# Altium PCB current_sensor_pcb.PcbDoc
Units mil, origin at the board's own origin, x right, y up, seen from the top; angles counter-clockwise.
Board outline 1538 x 1343 mil, 2 copper layers (Top Layer, Bottom Layer); 24 components, 17 nets, 126 pads, 25 vias.
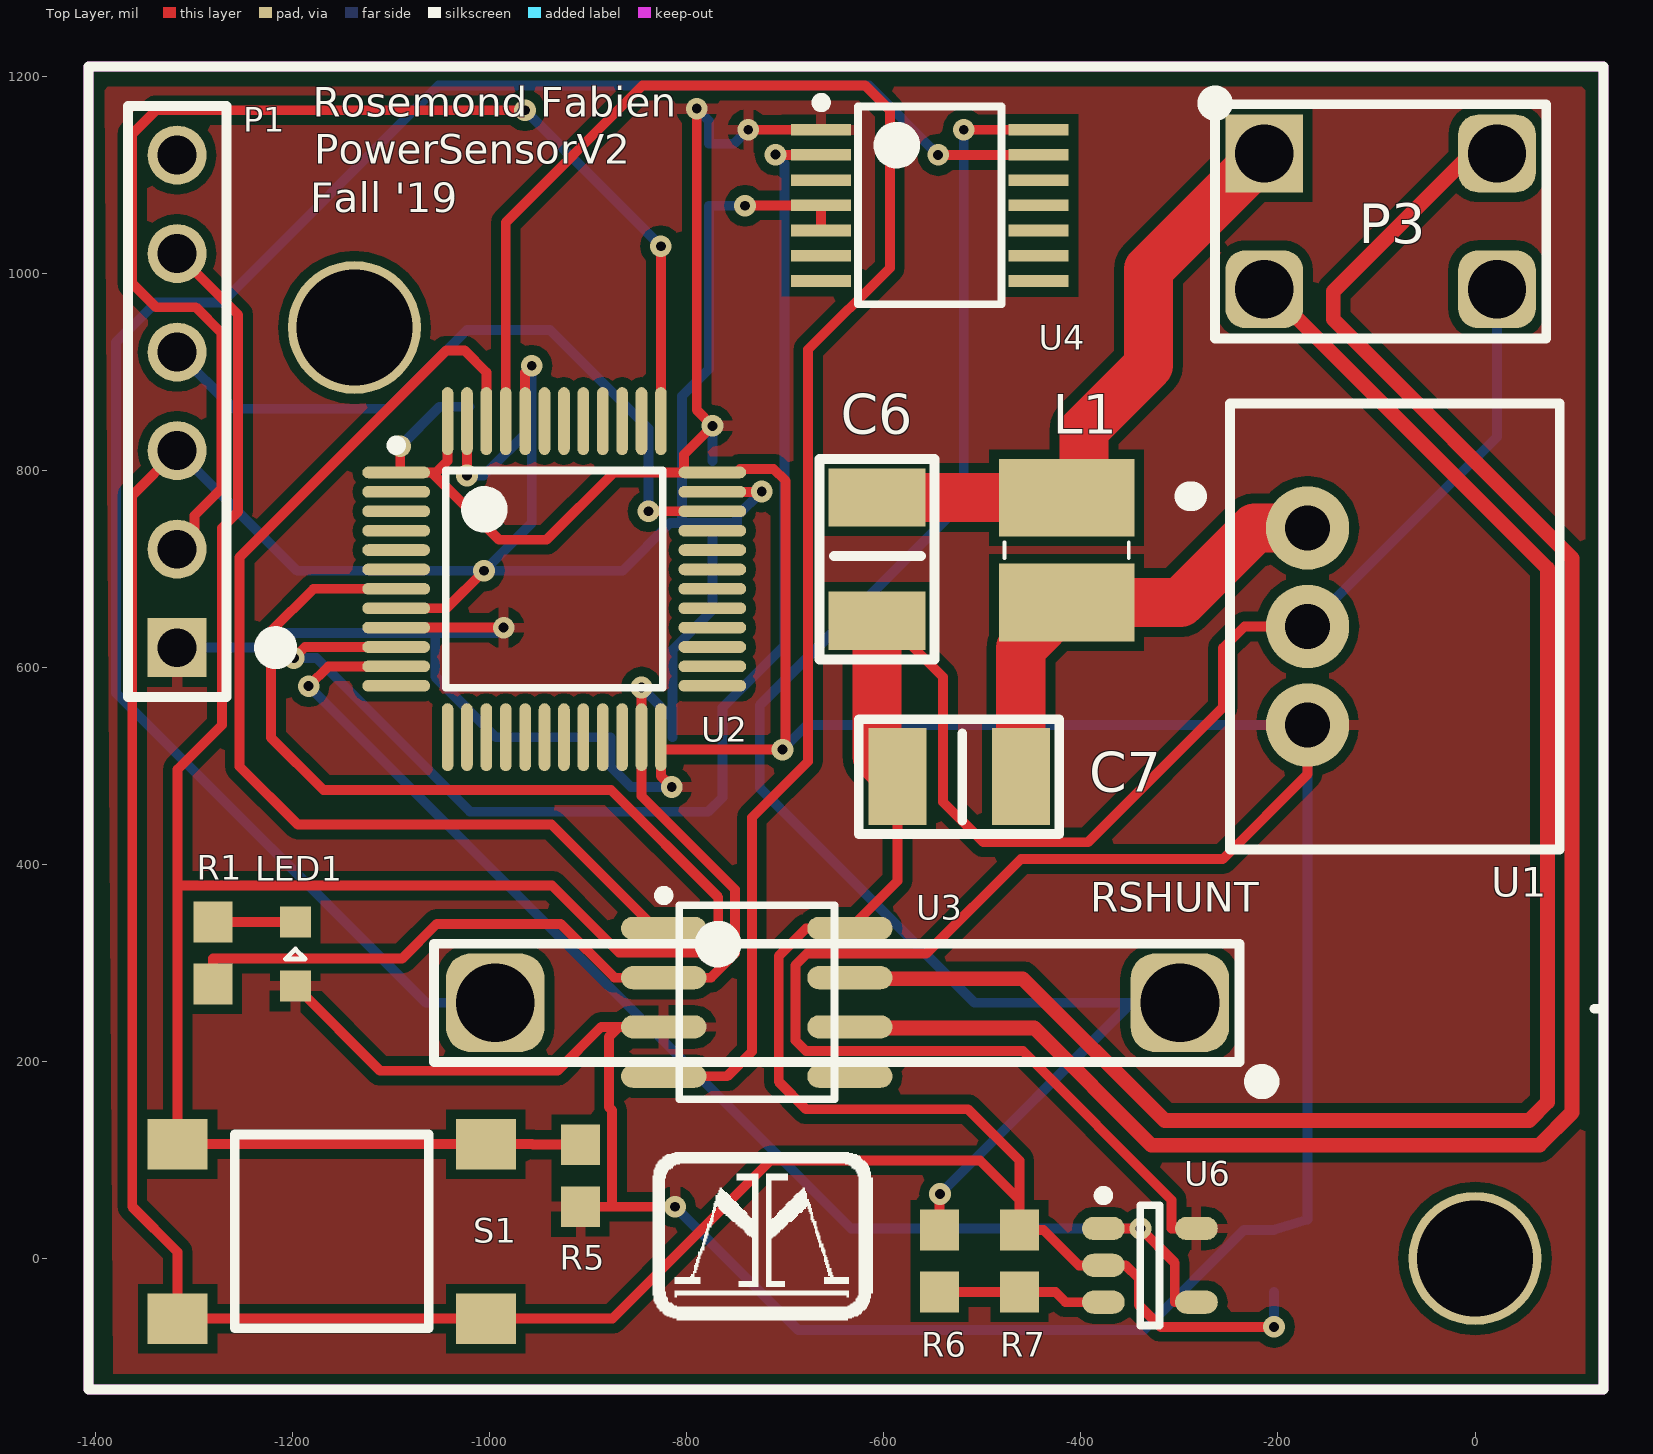
[diagram p0: Top Layer view]
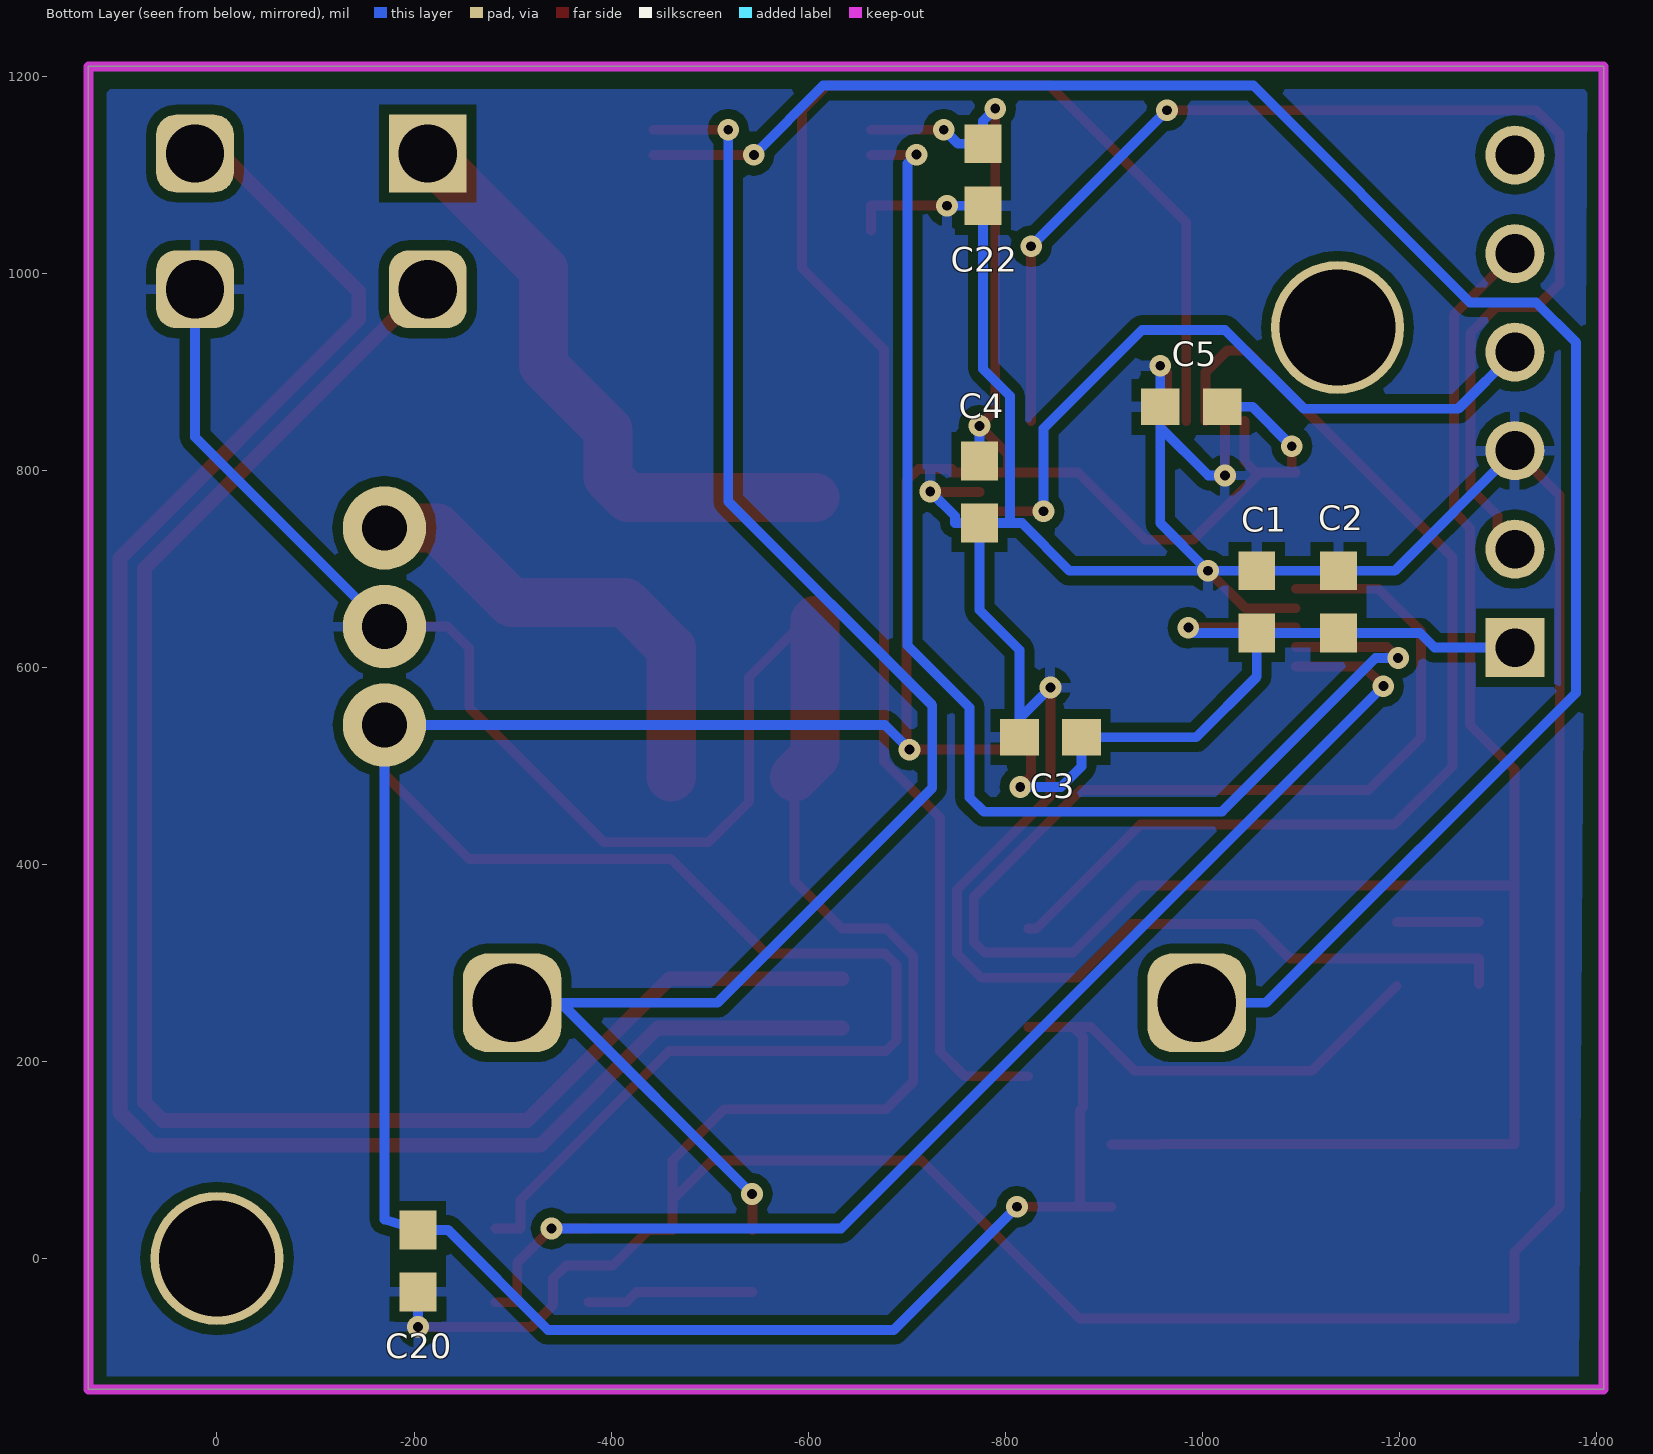
[diagram p1: Bottom Layer view, seen from below]

## Layer stack, top to bottom
Top Solder: solder mask 0.4, Solder Resist, Dk 3.5
Top Layer: signal copper 1.4
Dielectric 1: dielectric 12.6, FR-4, Dk 4.8
Bottom Layer: signal copper 1.4
Bottom Solder: solder mask 0.4, Solder Resist, Dk 3.5

## Board outline
-1407.5,-133 130.5,-133 130.5,1210 -1407.5,1210

## Design rules (kind name [scope] priority, off if disabled: settings)
Clearance [All] p1: gap=10 ignorepadtopadclearanceinfootprint=TRUE except(0: Arc-Hole Track-Hole SMDPad-Hole THPad-Hole Via-Hole Fill-Hole Poly-Hole Region-Hole Text-Hole; 7: Track-Track Track-SMDPad Track-Via SMDPad-SMDPad)
DiffPairsRouting [All] p1: maxlimit=10 minlimit=10 mostfreqgap=10 toplayer_minwidth=15 toplayer_maxwidth=15 toplayer_prefwidth=15 bottomlayer_minwidth=15 bottomlayer_maxwidth=15 bottomlayer_prefwidth=15 maxuncoupledlength=500
HoleSize [All] p1: absolutevalues=TRUE maxlimit=150 minlimit=10 maxpercent=80.000 minpercent=20.000
MinimumAnnularRing [All] p1: minimumring=7
MinimumSolderMaskSliver [All] p1: minsoldermaskwidth=1
PolygonConnect [All] p1: connectstyle=Relief reliefconductorwidth=10 reliefentries=4 polygonreliefangle="90 Angle" airgapwidth=10
RoutingVias [All] p1: holewidth=10 width=22 viastyle="Through Hole" minholewidth=10 minwidth=22 maxholewidth=100 maxwidth=150
SilkToSolderMaskClearance [IsPad] p1: minsilkscreentomaskgap=5 clearancetoexposedcopper=TRUE
SolderMaskExpansion [All] p1: expansion=4
Width [All] p1: maxlimit=150 minlimit=8 preferedwidth=10
26 further rules are at their usual default settings.

## Classes and differential pairs
differential pair CAN: +CAN_P -CAN_N

## Components (designator, comment, footprint, x,y, rotation, side; value= is the part's Value field where it differs from the comment)
C1 "Cap" CAPC0603 -1055.47,666.5 r90 bottom value=1uF
C2 "Cap" CAPC0603 -1138.5,666.5 r90 bottom value=10nF
C3 "Cap" CAPC0603 -846.08,529.13 r0 bottom value=100nF
C4 "Cap" CAPC0603 -774,778 r270 bottom value=100nF
C5 "Cap" CAPC0603 -989,864.5 r0 bottom value=100nF
C6 "CAP1210" CAP1210 -607,773.29 r90 top value=10uF
C7 "CAP1210" CAP1210 -460.21,489 r0 top value=10uF
C20 "Cap" CAPC0603 -204,-2.57 r90 bottom value=1uF
C22 "Cap" CAPC0603 -777.5,1100 r90 bottom value=10nF
L1 "RLS-567" RLS567 -414.5,719 r270 top
LED1 "LED" LED0603 -1197.5,309 r90 top
P1 "SWD" SWD_STM32 -1317.5,620 r180 top
P3 "WSBM8518L1000JT-MOLEX_4" WSBM8518L1000JT-MOLEX_4 -95.81,1052.71 r0 top locked
R1 "Res" RES0603 -1281,309.98 r270 top value=1k
R5 "Res" RES0603 -908,84 r90 top value=1k
R6 "Res" RES0603 -543.5,-2.57 r270 top value=698k
R7 "Res" RES0603 -462.5,-2.57 r90 top value=100k
RSHUNT "Res" WSBM8518L5000JK -299.62,259.51 r0 top value=500u
S1 "Button" PTS645xxxxSMTR92 -1160.5,27.5 r180 top
U1 "R-78C3.3-1.0" R-78C3.3-1.0 -170,741.5 r270 top
U2 "STM32F072CB" STM32F072CB -934.66,689.57 r0 top
U3 "SN65HVD230DR" SOIC-8pin -729,260 r0 top
U4 "INA302A3" INA302A2IPW -553.5,1069 r0 top
U6 "MCP6L01" MCP6L01R -330,-7 r0 top

## Footprints (in the part's own frame and the unit in brackets; to place one, negate y for a bottom-side part, rotate by r counter-clockwise, add the part's x,y. Pads: shape width x height; smd on the part's side, far side on the other; paste and mask are expansions set on the pad)
CAP1210 [mm]
  rect 1.5x2.5 smd: 1(-0.02,0) 2(-3.2,0)
  silkscreen extent -4.2,-1.48 0.97,1.48, body extent -3.22,-1.25 0,1.26, height 2.5
CAPC0603 [mm] "Chip Capacitor, 2-Leads, Body 1.60x0.80mm, IPC Medium Density"
  rect 1x0.95 smd: 1(-0.8,0) 2(0.8,0)
  body extent -0.88,-0.48 0.87,0.48, height 0.8
INA302A2IPW [mm] "IC CURRENT SENSING AMP 14TSSOP"
  rect 1.55x0.3 smd: 1(-2.8,1.95) 2(-2.8,1.3) 3(-2.8,0.65) 4(-2.8,0) 5(-2.8,-0.65) 6(-2.8,-1.3) 7(-2.8,-1.95) 8(2.8,-1.95) 9(2.8,-1.3) 10(2.8,-0.65) 11(2.8,0) 12(2.8,0.65) 13(2.8,1.3) 14(2.8,1.95)
  silkscreen extent -2.92,-2.55 1.85,2.77, body extent -2.25,-2.55 2.25,2.55, height 1.2
LED0603 [mm] "Chip LED, 2-Leads, Body 1.60x0.80mm, IPC Medium Density"
  rect 0.8x0.8 smd: A(-0.825,0) C(0.825,0)
  silkscreen extent -0.13,-0.25 0.13,0.25, body extent -0.88,-0.48 0.87,0.47, height 0.8
MCP6L01R [mm] "SOT23, 5-Leads, Body 2.90x2.70mm, Pitch 0.95mm, IPC Medium Density"
  oval 1.1x0.6 smd: 1(-1.2,0.95) 2(-1.2,0) 3(-1.2,-0.95) 4(1.2,-0.95) 5(1.2,0.95)
  silkscreen extent -1.32,-1.55 0.25,1.92, body extent -0.9,-1.55 0.9,1.55, height 1.45
PTS645xxxxSMTR92 [mm] "PTS645 Series SMT 6 mm Tactile Switch"
  rect 1.555x1.3 smd: A(-3.975,2.25) A(3.975,2.25) B(-3.975,-2.25) B(3.975,-2.25)
  silkscreen extent -2.5,-2.5 2.5,2.5, body extent -3,-3 3,3, height 4.5
R-78C3.3-1.0 [mm] "CONV DC/DC 1A 3.3V OUT SIP VERT"
  round 2.15 hole 1.15: 1(0,0) 2(2.54,0) 3(5.08,0)
  Bottom Layer region: 0.457,-3.048
  silkscreen extent -3.21,-3.05 8.29,6.5, body extent -3.3,-2.03 8.38,6.6, height 10.4
RES0603 [mm] "Chip Resistor, 2-Leads, Body 1.60x0.80mm, IPC Medium Density"
  rect 1.05x1 smd: 1(-0.8,0) 2(0.8,0)
  body extent -0.88,-0.48 0.87,0.47, height 0.8
RLS567 [mm]
  rect 2x3.5 smd: 1(-1.35,0) 2(1.35,0)
  silkscreen extent -0.2,-1.6 0.2,1.6, body extent -2.54,-1.9 2.54,1.91, height 2.6
SOIC-8pin [mm] "For 296-1345-1-ND"
  oval 2.2x0.6 smd: 1(-2.4,1.905) 2(-2.4,0.635) 3(-2.4,-0.635) 4(-2.4,-1.905) 5(2.4,-1.905) 6(2.4,-0.635) 7(2.4,0.635) 8(2.4,1.905)
  silkscreen extent -2.52,-2.5 2,2.88, body extent -2,-2.5 2,2.5, height 1.75
STM32F072CB [mm] "TSQFP, 48-Leads, Body 7.00x7.00mm, Pitch 0.50mm, IPC Medium Density"
  oval 1.75x0.3 smd: 1(-4.075,2.75) 2(-4.075,2.25) 3(-4.075,1.75) 4(-4.075,1.25) 5(-4.075,0.75) 6(-4.075,0.25) 7(-4.075,-0.25) 8(-4.075,-0.75) 9(-4.075,-1.25) 10(-4.075,-1.75) 11(-4.075,-2.25) 12(-4.075,-2.75) 25(4.075,-2.75) 26(4.075,-2.25) 27(4.075,-1.75) 28(4.075,-1.25) 29(4.075,-0.75) 30(4.075,-0.25) 31(4.075,0.25) 32(4.075,0.75) 33(4.075,1.25) 34(4.075,1.75) 35(4.075,2.25) 36(4.075,2.75)
  oval 0.3x1.75 smd: 13(-2.75,-4.075) 14(-2.25,-4.075) 15(-1.75,-4.075) 16(-1.25,-4.075) 17(-0.75,-4.075) 18(-0.25,-4.075) 19(0.25,-4.075) 20(0.75,-4.075) 21(1.25,-4.075) 22(1.75,-4.075) 23(2.25,-4.075) 24(2.75,-4.075) 37(2.75,4.075) 38(2.25,4.075) 39(1.75,4.075) 40(1.25,4.075) 41(0.75,4.075) 42(0.25,4.075) 43(-0.25,4.075) 44(-0.75,4.075) 45(-1.25,4.075) 46(-1.75,4.075) 47(-2.25,4.075) 48(-2.75,4.075)
  silkscreen extent -4.2,-2.8 2.8,3.57, body extent -3.5,-3.5 3.5,3.5, height 1.6
SWD_STM32 [mil] "SWD connector matching the pinout on STM Discovery Boards"
  rect 60x60 hole 39.37: 1(0,0)
  round 60 hole 39.37: 2(0,-100) 3(0,-200) 4(0,-300) 5(0,-400) 6(0,-500)
  silkscreen extent -110,-550 50,50
WSBM8518L1000JT-MOLEX_4 [mm] "4 pins of molex type MX150 male to female connector"
  rect 2x2 hole 1.5: 1(-3,1.75)
  rrect50% 2x2 hole 1.5: 2(3,1.75) 3(-3,-1.75) 4(3,-1.75)
  silkscreen extent -4.42,-3.02 4.27,3.2
WSBM8518L5000JK [mil] "2 shunt resistor pins of MOLEX type WSBM8518L1000JT"
  rrect50% 100x100 hole 80: 1(0,0) 2(-694.88,0)
  silkscreen extent -757,-86 89,60

## Part data
C1 C20: Manufacturer Part Number=C0603C105K8PACTU, Supplier Part Number 1=399-3118-2-ND, Supplier 1=Digi-Key
C2 C22: Supplier Part Number 1=490-1313-2-ND, Supplier 1=Digi-Key
C3 C4 C5: Supplier Part Number 1=399-7374-2-ND, Supplier 1=Digi-Key
C6 C7: "CAP CER 10UF 50V 20% X5R 1210", Supplier Part Number 1=CGA6P1X7R1N106K250AC, Supplier 1=Digi-Key
L1: "Inductor", Manufacturer_Name="RECOM Power", Mouser Part Number=919-RLS-567, Datasheet Link=https://componentsearchengine.com/Datasheets/1/RLS-567.pdf, Height=3.1mm, Manufacturer_Part_Number=RLS-567, Mouser Price/Stock=https://www.mouser.com/Search/Refine.aspx?Keyword=919-RLS-567
LED1: Color=Green, Supplier Part Number 1=754-1122-1-ND, Supplier 1=Digi-Key
P1: library part SWD_STM32, "SWD connector matching the pinout on STM Discovery Boards"
P3: "4 pins of molex type MX150 male to female connector", Manufacturer 1=Vishay-Dale, Manufacturer Part Number 1=WSBM8518L1000JK, Mating Connector Part Number 1=WM15276-ND, Supplier Part Number 1=541-1906-ND, Supplier Number 1=Digi-Key
R1 R5: Supplier Part Number 1=RNF14FTD1K00TR-ND, Supplier 1=Digi-Key
R6: Supplier Part Number 1=634KXCT-ND, Supplier 1=Digi-Key
R7: Supplier Part Number 1=100KXTR-ND, Supplier 1=Digi-Key
RSHUNT: Supplier Part Number 1=RMCF0603JT10K0CT-ND, Supplier 1=Digi-Key
S1: "SPST Button", Supplier Part Number 1=CKN9087CT-ND, Supplier 1=Digi-Key
U1: "CONV DC/DC 1A 3.3V OUT SIP VERT", Supplier Part Number 1=945-1394-5-ND, Supplier 1=Digi-Key
U2: "MCU 32BIT 128KB FLASH 48LQFP", Supplier Part Number 1=497-14645-ND, Supplier 1=Digi-Key
U3: "IC TXRX CAN 1MBPS 3.3V 8SOIC", Supplier Part Numbe 1=296-11654-1-ND, Supplier 1=Digi-Key
U4: library part INA302A2IPW, "IC CURRENT SENSING AMP 14TSSOP", Manufacturer 1="Texas Instruments", Manufacturer Part Number 1=INA302A3IPW, Supplier Part Number 1=INA302A3QPWRQ1, Supplier 1=Digi-Key
U6: "Op Amp Rail-to-Rail 1Mhz", Supplier Part Number 1=MCP6L01T-E/OTCT-ND, Supplier 1=Digi-Key

## Free pads (board coordinates)
  round 135 hole 118: 3(-1137.5,945) 4(0,0)

## Via types
v1: diameter 22, hole 10, Top Layer to Bottom Layer, tented both sides, 25 vias

## Nets (pads, with @x,y where several pads share a name; then routed paths per layer and width w, separated by ;. In a path a pad name is that pad's centre, name@x,y a point inside that pad or via, vN(x,y) a via of type N, cw(c..) or ccw(c..) an arc to the next point about the centre after c; other vN are vias at no path point)
3V3: C1.1 C2.1 C3.1 C4.1 C5.1 C20.2 C22.2 LED1.A P1.1 R5.1 U1.3 U2.1 U2.9 U2.24 U2.36 U2.48 U3.3 U4.1 U6.5 | length 6193
  Top Layer w10: LED1.A -1111.48,190.5 -931.5,190.5 -887,235 -869,235 ; U2.9 v1(-986,640.35) ; U2.1 U2.1@-1091,797.83 ; v1(-1091,824.5) U2.1@-1091,797.83 ; U2.48 -1042.93,809.5 -1054.59,797.83 -1059,797.83 ; R5.1 -876,52.5 ; U2.24 U2.24@-826.39,516.5 ; U3.3 -869,235 ; v1(-815.39,478.5) -826.39,489.5 U2.24@-826.39,516.5 ; v1(-812,52.5) -876,52.5 ; v1(-790,1167.18) -790,861.18 v1(-774,845.18) -803,816.18 U2.36@-803,797.83 ; v1(-737.72,1145.77) U4.1 ; v1(-703,516.5) U2.24@-826.39,516.5 ; v1@-700,516.5 -700,789.5 -712,801.5 -746,801.5 -746,797.83 U2.36 U2.36@-803,797.83 ; U6.5 -308,30.4 -308,59.5 -459,210.5 -679,210.5 -689.82,221.32 -689.82,297.68 -678,309.5 -557,309.5 -461,405.5 -256,405.5 -170,491.5 U1.3 ; U2.1@-1091,797.83 -1059,797.83 ; -1059,797.83 -990.67,729.5 -942.33,729.5 -874,797.83 U2.36@-803,797.83 ; -876,52.5 -876,150.5 -879,153.5 -879,225 -869,235
  Bottom Layer w10: P1.1 -1236,620 -1221,635 C2.1 C1.1 ; v1(-1091,824.5) -1051,864.5 C5.1 ; v1(-986,640.35) -991.35,635 C1.1 ; v1(-815.39,478.5) -856.57,478.5 -877.57,499.5 C3.1 -994.1,529.13 -1055.47,590.5 C1.1 ; v1(-812,52.5) -687,-72.5 -336.13,-72.5 -234.7,28.93 C20.2 -170,39.5 U1.3 -678,541.5 v1(-703,516.5) ; v1(-790,1167.18) -777.5,1154.68 C22.2 -752,1131.5 v1(-737.72,1145.77) ; C4.1 v1(-774,845.18)
24V: C6.1 L1.1 P3.1 | length 815.7
  Top Layer w10: C6.1 -511,772.5 -510.65,772.15 L1.1
  Top Layer w50: C6.1 -417.27,772.5 -397,792.77 -397,841.19 -331.53,906.66 -331.53,1004 P3.1
ADC_IN0: U2.10 U4.2 | length 1343
  Top Layer w10: v1(-1199,609.5) -1187.83,620.67 U2.10 ; v1(-710,1120.5) -709.68,1120.18 U4.2
  Bottom Layer w10: v1(-1199,609.5) -1176,609.5 -1020,453.5 -778.37,453.5 -764,467.87 -764,559.21 -701,622.21 -701,1111.5 v1(-710,1120.5)
ADC_IN1: U2.11 U6.1 U6.4 | length 1318.6
  Top Layer w10: v1(-1184,580.98) -1164,600.98 U2.11 ; U6.1 v1(-339.59,30.4) -304.79,-4.4 -304.79,-44.4 U6.4
  Bottom Layer w10: v1(-1184,580.98) -633.42,30.4 v1(-339.59,30.4)
CAN_N: P3.3 U3.7 | length 1816.6
  Top Layer w15: U3.7@-634.51,284 -459,284 -315,140 55,140 73.5,158.5 73.5,700.5 -209.81,983.81 P3.3 ; -558.51,284 -464,284
CAN_P: P3.2 U3.6 | length 2063.3
  Top Layer w15: U3.6@-634.51,234 -447.5,234 -328.5,115 65.36,115 98.5,148.14 98.5,710.86 -144,953.36 -144,981.5 -3.89,1121.61 P3.2 ; -558.51,234 -449.36,234
CAN_RX: U2.45 U3.4 | length 1772.7
  Top Layer w10: U2.45 -983.87,1051.63 -845,1190.5 -619,1190.5 -594,1165.5 -594,1005.5 -677,922.5 -677,504.5 -734,447.5 -734,210 -759,185 U3.4
CAN_TX: U2.46 U3.1 | length 1106.9
  Top Layer w10: U2.46 -1003.56,899.5 -1025.56,921.5 -1044.33,921.5 -1254,711.83 -1254,499.5 -1195,440.5 -937.5,440.5 -832,335 U3.1
GND: C1.2 C2.2 C3.2 C4.2 C5.2 C6.2 C7.2 C20.1 C22.1 P1.3 P3.4 R1.2 R7.2 S1.A U1.2 U2.8 U2.23 U2.35 U2.44 U2.47 U3.2 U3.8 U4.4 U4.5 U6.2 | length 7188.9
  Top Layer w10: P1.3 -1363,774.5 -1363,52.5 -1317,6.5 -1317,-61.08 -1004,-61.08 -875.58,-61.08 -715,99.5 -502.5,99.5 -462.5,59.5 ; R1.2 -1281,304.5 -1089,304.5 -1054,339.5 -928,339.5 -873.5,285 U3.2 -775.68,285 -751.18,309.5 -751.18,374.6 -846.08,469.5 U2.23 -846.08,579.42 v1(-846,579.5) ; U2.8 -1043.96,660.04 v1(-1006,698) ; v1(-1023.24,794.72) U2.47 ; U2.44 -964.19,899.45 v1(-957.5,906.14) ; U2.35 -724.35,778.15 v1(-724,778.5) ; v1(-741,1068.5) -740.5,1069 U4.4 U4.5 ; C6.2 -597,647.3 -540,590.3 -540,463.5 -499,422.5 -393,422.5 -256,559.5 -256,619.5 -234,641.5 U1.2 ; C7.2 -586.2,383.32 U3.8 -679,335 -706.82,307.18 -706.82,179.32 -679,151.5 -514.5,151.5 -462.5,99.5 -462.5,59.5 ; v1(-204,-69.5) -319,-69.5 -341,-47.5 -341,-20.5 -354.5,-7 U6.2 -402.07,-7 -438,28.93 R7.2 -462.5,59.5
  Top Layer w50: C6.2 -607,509.8 C7.2
  Bottom Layer w10: P1.3 -1195.5,698 C2.2 C1.2 v1(-1006,698) ; v1(-1023.24,794.72) -1006.28,794.72 -957.5,843.49 ; v1(-957.5,906.14) C5.2 -957.5,843.49 ; v1(-846,579.5) -814.58,548.08 ; C3.2 -814.58,548.08 ; v1(-741,1068.5) C22.1 -777.5,903 -805,875.5 -805,746.5 ; v1(-724,778.5) -749,753.5 -749,746.5 C4.2 ; v1(-204,-69.5) C20.1 ; U1.2 22.3,833.8 P3.4 ; v1(-1006,698) -865.51,698 -817,746.5 -805,746.5 ; v1(-1006,698) -957.5,746.49 -957.5,843.49 ; -814.58,548.08 -814.58,617.5 -774,658.08 C4.2 ; -805,746.5 C4.2
NetC7_1: C7.1 L1.2 U1.1 | length 471.9
  Top Layer w50: C7.1 -461,619.35 L1.2 -299.15,665.85 -223.5,741.5 U1.1
NetLED1_C: LED1.C R1.1 | length 83.5
  Top Layer w10: R1.1 LED1.C
NetR6_2: R6.2 R7.1 U6.3 | length 170.5
  Top Layer w10: R6.2 R7.1 -426,-34.07 -415.66,-44.4 U6.3
NRST: P1.5 R5.2 S1.B U2.7 | length 2764.9
  Top Layer w10: P1.5 -1255.5,958 -1255.5,758 -1272,741.5 -1272,541.5 -1317,496.5 -1317,378.5 ; U2.7 -1179,679.72 -1222,636.72 -1222,528.5 -1169,475.5 -877,475.5 -768.18,366.68 -768.18,321.32 -779,310.5 -869,310.5 -937,378.5 -1317,378.5 ; R5.2 -956.41,115.5 -957,116.08 -1004,116.08 -1317,116.08 -1317,378.5
SENSE+: R6.1 RSHUNT.1 U4.14 | length 1657.6
  Top Layer w10: R6.1 -543.5,65 v1(-543,65.5) ; v1(-519,1145.77) U4.14
  Bottom Layer w10: v1(-543,65.5) RSHUNT.1@-348.99,259.51 ; v1(-519,1145.77) -519,768.5 -726,561.5 -726,477.5 -508.01,259.51 RSHUNT.1@-348.99,259.51 ; RSHUNT.1 RSHUNT.1@-348.99,259.51
SENSE-: RSHUNT.2 U4.13 | length 1944.5
  Top Layer w10: v1(-545,1120.18) U4.13
  Bottom Layer w10: RSHUNT.2 -1065.01,259.51 -1379.5,574 -1379.5,930 -1339,970.5 -1272,970.5 -1052,1190.5 -615.32,1190.5 v1(-545,1120.18)
SWCLK: P1.2 U2.37 | length 1292.8
  Top Layer w10: P1.2 -1300,720 -1300,754 -1272.5,781.5 -1272.5,939.5 -1298.5,965.5 -1339,965.5 -1363,989.5 -1363,1141.5 -1339,1165.5 v1(-964.39,1165.5) ; U2.37 v1(-826.39,1027.5)
  Bottom Layer w10: v1(-964.39,1165.5) v1(-826.39,1027.5)
SWDIO: P1.4 U2.34 | length 725.7
  Top Layer w10: v1(-839,758.46) U2.34
  Bottom Layer w10: P1.4 -1260,862.5 -1103.33,862.5 -1023.33,942.5 -939,942.5 -839,842.5 v1(-839,758.46)
pads on no net: P1.6 U2.2 U2.3 U2.4 U2.5 U2.6 U2.12 U2.13 U2.14 U2.15 U2.16 U2.17 U2.18 U2.19 U2.20 U2.21 U2.22 U2.25 U2.26 U2.27 U2.28 U2.29 U2.30 U2.31 U2.32 U2.33 U2.38 U2.39 U2.40 U2.41 U2.42 U2.43 U3.5 U4.3 U4.6 U4.7 U4.8 U4.9 U4.10 U4.11 U4.12

## Polygon pours and split planes (outlines as drawn)
GND on Bottom Layer "Bottom Layer-GND" (solid, pour order 64): -1382.19,-119.69 111.81,-119.69 111.81,1183.31 108.31,1186.81 -1391.19,1186.81
no net on Bottom Layer "NONET_L02_P022" (solid, pour order 22): -1402.5,1190
no net on Bottom Layer "NONET_L02_P006" (solid, pour order 6): -1432.5,1240
3V3 on Top Layer "Top Layer-3V3" (solid, pour order 62): -1382.19,-117.19 111.81,-117.19 111.81,1185.81 108.31,1189.31 -1391.19,1189.31
no net on Top Layer "NONET_L01_P026" (solid, pour order 26): -1407.5,1195
no net on Top Layer "NONET_L01_P018" (solid, pour order 18): -1407.5,-134.5

## Keep-outs
Keep-Out Layer:
  the board outline again, w10

## Silkscreen, mask and mechanical layers (free items; w line width, h text height)
Top Overlay:
  drawing of 781 lines, arcs and shapes, not listed
  text "Rosemond Fabien" at -1180,1159 h30
  text "PowerSensorV2" at -1178.5,1111 h30
  text "Fall '19" at -1182.5,1062 h30
Board Outline:
  the board outline again, w10